# Altium PCB IndAlarmSe0.PcbDoc
Units mil, origin at the board's own origin, x right, y up, seen from the top; angles counter-clockwise.
Board outline 6000 x 4000 mil, 2 copper layers (Top Layer, Bottom Layer); 4 components, 3 nets, 11 pads, 0 vias.
Unrouted connection lines stored in the file: 2.
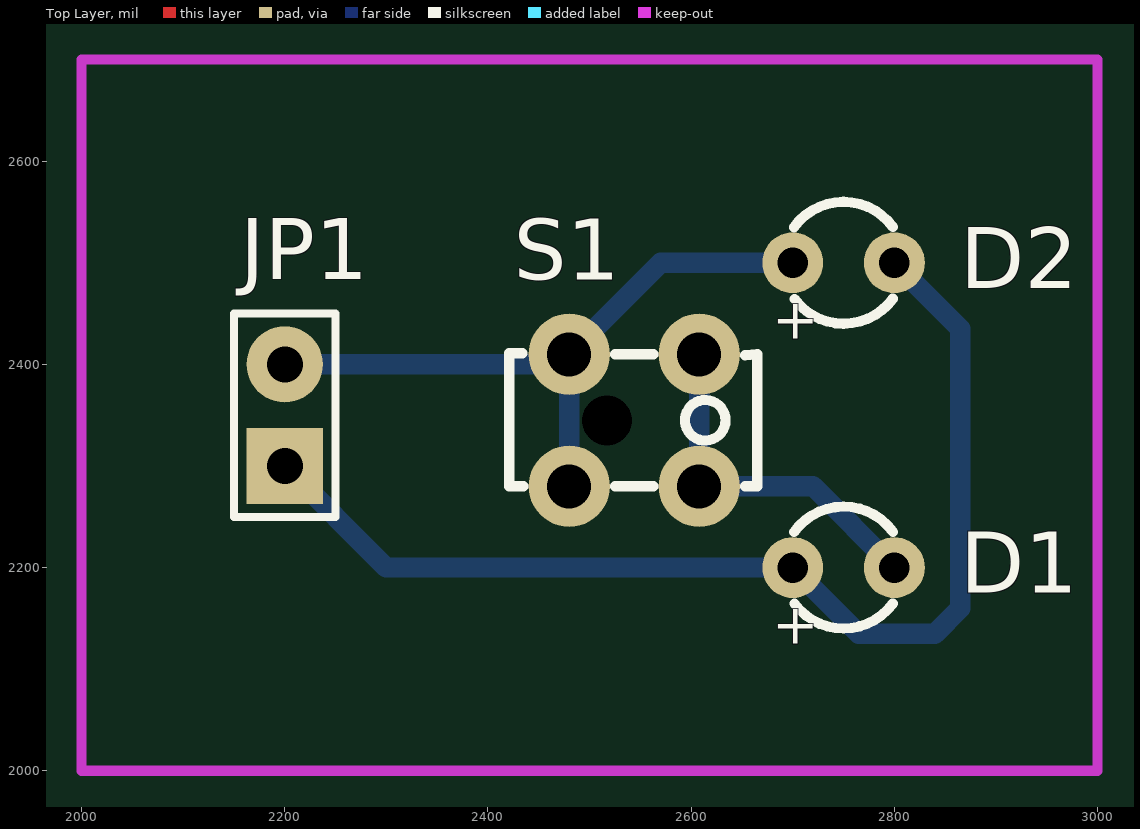
[diagram p0: Top Layer view]
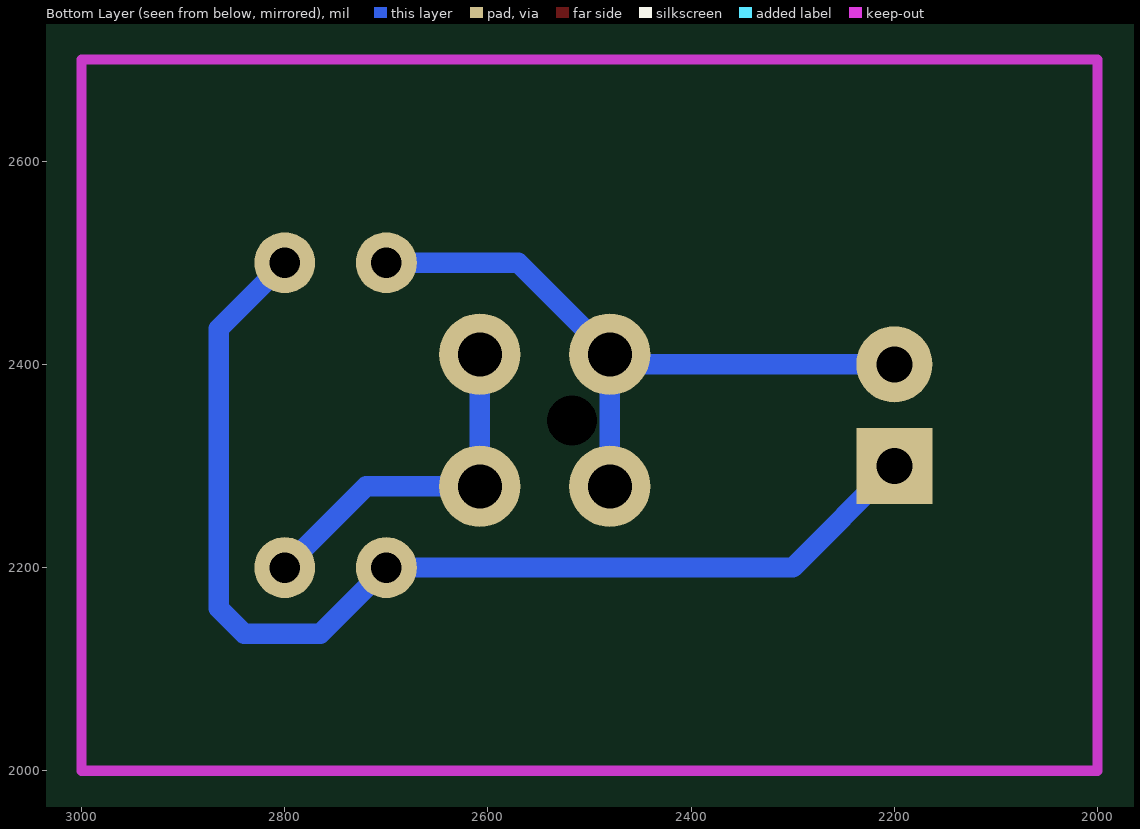
[diagram p1: Bottom Layer view, seen from below]

## Layer stack, top to bottom
Top Layer: signal copper 1.4
Dielectric: dielectric 12.6, FR-4, Dk 4.8
Bottom Layer: signal copper 1.4

## Board outline
1000,1000 7000,1000 7000,5000 1000,5000

## Design rules (kind name [scope] priority, off if disabled: settings)
Clearance [All] p1: gap=10
ComponentClearance [All] p1: gap=10 collisioncheckmode=0
PolygonConnect [All] p1: connectstyle=Relief reliefconductorwidth=10 reliefentries=4 polygonreliefangle="90 Angle"
RoutingLayers [All] p1: top layer=Horizontal bottom layer=Vertical
RoutingVias [All] p1: holewidth=28 width=50 viastyle="Through Hole" minholewidth=28 minwidth=50 maxholewidth=28 maxwidth=50
SolderMaskExpansion [All] p1: expansion=4
TestPointUsage [All] p1: valid=0 allowmultiple=FALSE
Testpoint [All] p1: side=15 testpointundercomponent=TRUE minsize=40 maxsize=100 preferedsize=60 minholesize=0 maxholesize=40 preferedholesize=32 testpointgrid=1 style=1023 order=-539222988
Width [All] p1: maxlimit=10 minlimit=10 preferedwidth=10
16 further rules are at their usual default settings.

## Components (designator, comment, footprint, x,y, rotation, side; value= is the part's Value field where it differs from the comment)
D1 "red" led3mm 2700,2200 r0 top
D2 "green" LED3MM 2700,2500 r0 top
JP1 "Header 2" HDR1X2 2200,2300 r90 top (schematic designator JP?)
S1 "SW-PB" SPPB512300 2480,2280 r0 top

## Footprints (in the part's own frame and the unit in brackets; to place one, negate y for a bottom-side part, rotate by r counter-clockwise, add the part's x,y. Pads: shape width x height; smd on the part's side, far side on the other; paste and mask are expansions set on the pad)
HDR1X2 [mm] "Connector; Header; 2 Position"
  rect 1.905x1.905 hole 0.9: 1(0,0)
  round 1.905 hole 0.9: 2(2.54,0)
  silkscreen extent -1.27,-1.27 3.81,1.27
led3mm [mil]
  round 60 hole 30: 1(0,0) 2(100,0)
  silkscreen extent 1,-60 99,60
LED3MM [mil]
  round 60 hole 30: 1(0,0) 2(100,0)
  silkscreen extent 1,-60 99,60
SPPB512300 [mil] "SPPB series switch"
  round 0 hole 49.21: 0(37.4,64.96)
  round 80 hole 43.31: 1(0,0) 1(0,129.92) 2(127.95,0) 2(127.95,129.92)
  silkscreen extent -59,0 185,131

## Part data
D1 D2: library part LED3, "Typical BLUE SiC LED"
JP1: "Header, 2-Pin"
S1: "Switch"

## Nets (pads, with @x,y where several pads share a name; then routed paths per layer and width w, separated by ;. In a path a pad name is that pad's centre, name@x,y a point inside that pad or via, vN(x,y) a via of type N, cw(c..) or ccw(c..) an arc to the next point about the centre after c; other vN are vias at no path point)
NetD1_1: D1.1 D2.2 JP1.1 | length 1110.6
  Bottom Layer w20: JP1.1 2300,2200 D1.1 2765,2135 2840,2135 2865,2160 2865,2435 D2.2
NetD1_2: D1.2 JP1.2 S1.2 | length 896.6
  Bottom Layer w10: 2470.08,2400 2480,2409.92 2480,2410
  Bottom Layer w20: JP1.2 2470.08,2400 ; 2480,2410 2570,2500 2700,2500 ; S1.2@2607.95,2409.92 2607.95,2280 2720,2280 D1.2
NetD2_1: D2.1 S1.1 | length 129.9
  Bottom Layer w20: S1.1@2480,2280 S1.1@2480,2409.92
pads on no net: S1.0

## Keep-outs
Keep-Out Layer:
  lines w10: 2000,2000 2000,2700 3000,2700 3000,2000 2000,2000

## Text inside footprints (layer, text, board x,y; h text height)
D1: Top Overlay "+" at 2680,2125 h40
D2: Top Overlay "+" at 2680,2425 h40